# Altium PCB modulo_comunicacion_pcbdoc.PcbDoc
Units mm, origin at the board's own origin, x right, y up, seen from the top; angles counter-clockwise.
Board outline 152.4 x 101.6 mm, 2 copper layers (Top Layer, Bottom Layer); 32 components, 31 nets, 101 pads, 0 vias.
Unrouted connection lines stored in the file: 65.
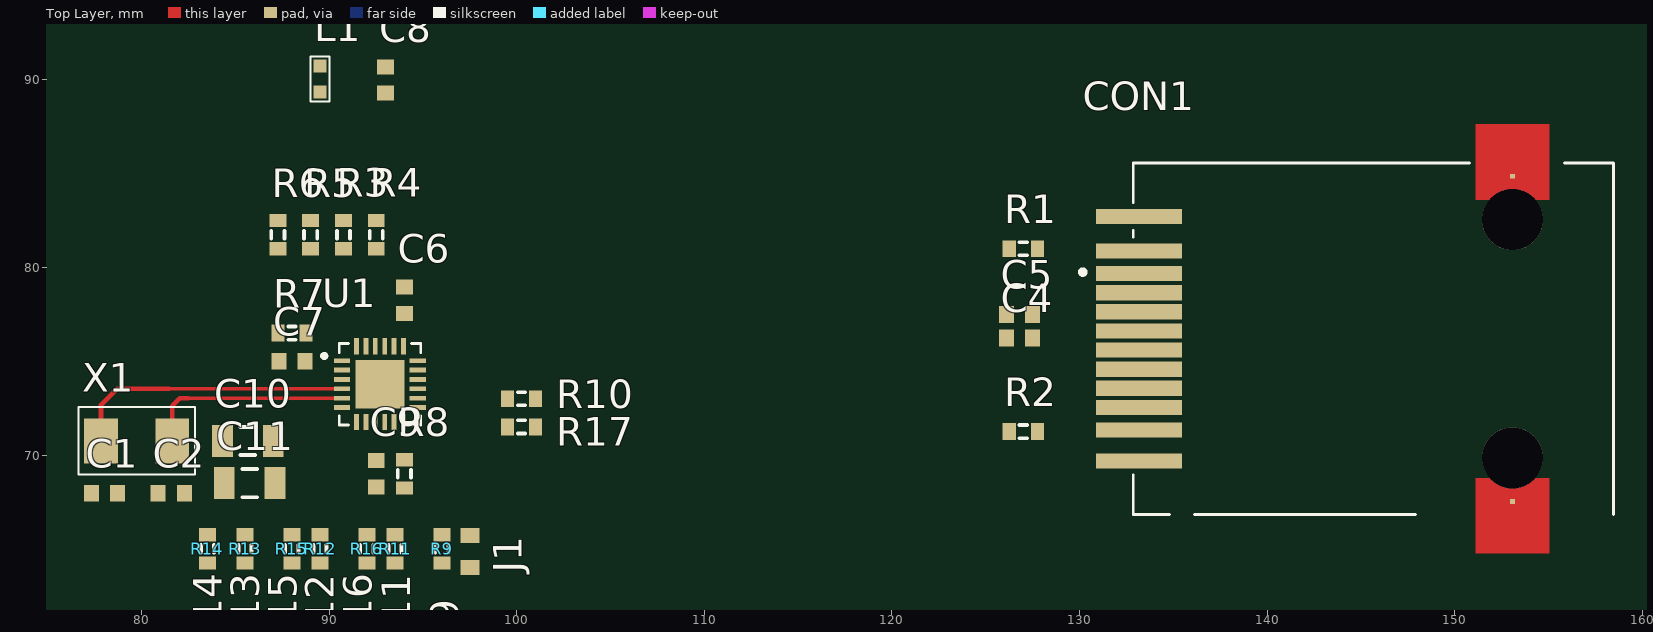
[diagram p0: Top Layer view]
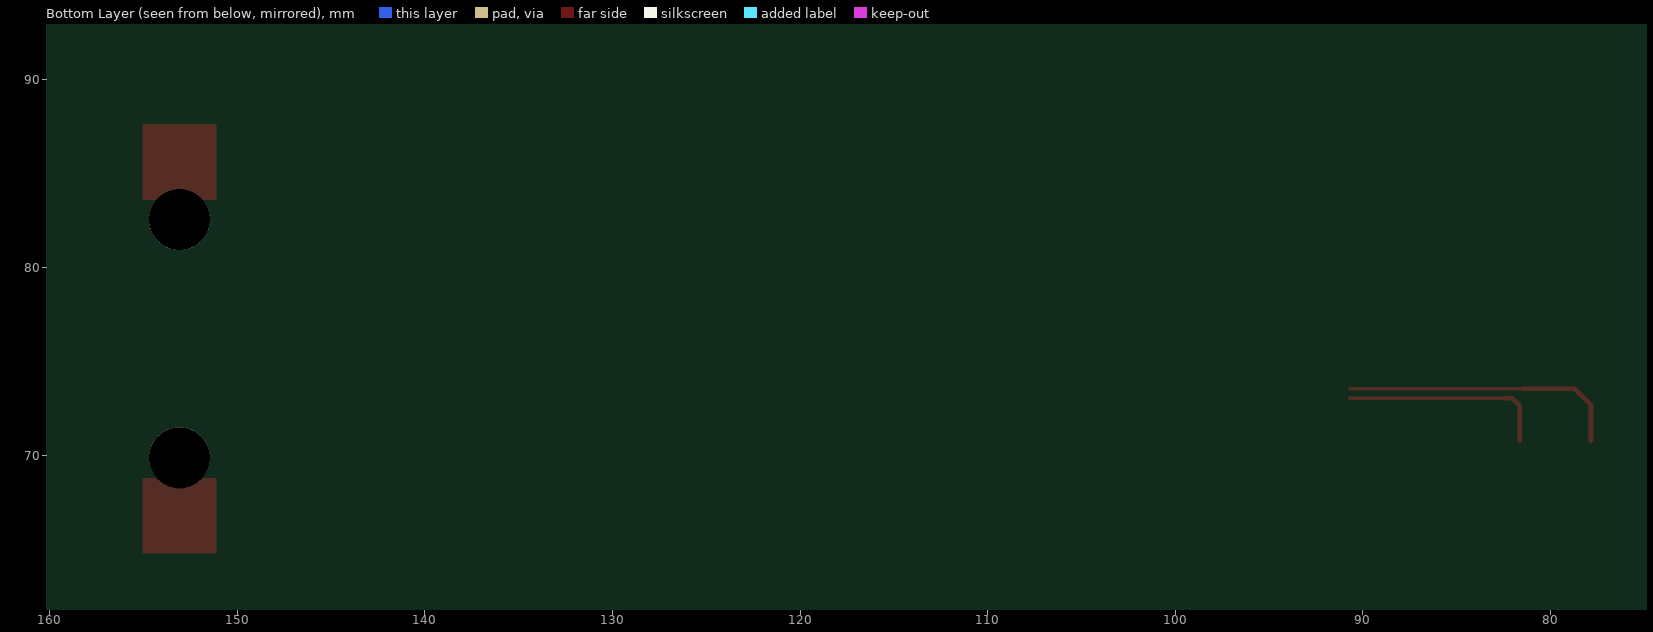
[diagram p1: Bottom Layer view, seen from below]

## Layer stack, top to bottom
Top Solder: solder mask 0.0102, Solder Resist, Dk 3.5
Top Layer: signal copper 0.0356
Dielectric 1: dielectric 0.32, FR-4, Dk 4.8
Bottom Layer: signal copper 0.0356
Bottom Solder: solder mask 0.0102, Solder Resist, Dk 3.5

## Board outline
25.4,25.4 177.8,25.4 177.8,127 25.4,127

## Design rules (kind name [scope] priority, off if disabled: settings)
Clearance Cristal_Net_Class [InNetClass('Cristal_Net_Class')] p1: gap=0.254 ignorepadtopadclearanceinfootprint=FALSE except(0: Arc-Hole Track-Hole SMDPad-Hole THPad-Hole Via-Hole Fill-Hole Poly-Hole Region-Hole Text-Hole; 0.2: Arc-Arc Arc-Track Arc-SMDPad Track-Track Track-SMDPad SMDPad-SMDPad)
Clearance [All] p2: gap=0.254 ignorepadtopadclearanceinfootprint=FALSE except(0: Arc-Hole Track-Hole SMDPad-Hole THPad-Hole Via-Hole Fill-Hole Poly-Hole Region-Hole Text-Hole; 0.2: SMDPad-SMDPad)
PolygonConnect [All] p1: connectstyle=Relief reliefconductorwidth=0.254 reliefentries=4 polygonreliefangle="90 Angle" airgapwidth=0.254
RoutingVias [All] p1: holewidth=0.711 width=1.27 viastyle="Through Hole" minholewidth=0.711 minwidth=1.27 maxholewidth=0.711 maxwidth=1.27
SolderMaskExpansion [All] p1: expansion=0.102 istentingtop=FALSE
Width Cristal_Net_Class_1 [All] p1: maxlimit=0.254 minlimit=0.254 preferedwidth=0.254
Width [All] p2: maxlimit=0.254 minlimit=0.2 preferedwidth=0.254 minimp=50.000000 maximp=50.000000 favimp=50.000000
30 further rules are at their usual default settings.

## Classes and differential pairs
net class Cristal_Net_Class: NetC1_2 NetC2_2
pad class Ethernet_Pad_Class: CON1-1 CON1-2 CON1-3 CON1-4 CON1-5 CON1-6 CON1-7 CON1-8 CON1-9 CON1-10 CON1-11 CON1-12 CON1-13 CON1-14 CON1-16 CON1-17

## Components (designator, comment, footprint, x,y, rotation, side; value= is the part's Value field where it differs from the comment)
C1 "Cap Semi" 1608[0603] 78.013,67.966 r180 top value=30pF
C2 "Cap Semi" 1608[0603] 81.572,67.966 r0 top value=30pF
C4 "Cap Semi" 1608[0603] 126.8,76.25 r0 top value=100nF
C5 "Cap Semi" 1608[0603] 126.8,77.5 r0 top value=100nF
C6 "Cap Semi" 1608[0603] 94,78.25 r270 top value=100nF
C7 "Cap Semi" 1608[0603] 88,75 r0 top value=100nF
C8 "Cap Semi" 1608[0603] 93,90 r270 top value=10uF
C9 "Cap Semi" 1608[0603] 92.5,69 r90 top value=100nF
C10 "Cap Semi" C1206 85.65,70.75 r0 top value=470nF
C11 "Cap Semi" C1206 85.75,68.5 r0 top value=10uF
CON1 "ARJE-0034" ARJE-0034 145.669,76.2 r270 top
J1 "JUMPER_SMD_0603" JUMPER_SMD_0603 97.5,64 r90 top
L1 "GLRF1608T101M-LR" GLRF1608T101M-LR 89.5,90.75 r270 top
R1 "Res3" J1-0603 127,81 r0 top value=270
R2 "Res3" J1-0603 127,71.25 r0 top value=270
R3 "Res3" J1-0603 90.75,81.75 r90 top value=50
R4 "Res3" J1-0603 92.5,81.75 r90 top value=50
R5 "Res3" J1-0603 89,81.75 r90 top value=50
R6 "Res3" J1-0603 87.25,81.75 r90 top value=50
R7 "Res3" J1-0603 88,76.5 r0 top value=12K1
R8 "Res3" J1-0603 94,69 r90 top value=10K
R9 "Res3" J1-0603 96,65 r270 top value=1K5
R10 "Res3" J1-0603 100.25,73 r0 top value=10K
R11 "Res3" J1-0603 93.5,65 r270 top value=10K
R12 "Res3" J1-0603 89.5,65 r270 top value=10K
R13 "Res3" J1-0603 85.5,65 r270 top value=10K
R14 "Res3" J1-0603 83.5,65 r270 top value=33
R15 "Res3" J1-0603 88,65 r90 top value=33
R16 "Res3" J1-0603 92,65 r270 top value=33
R17 "Res3" J1-0603 100.25,71.5 r0 top value=33
U1 "LAN8742A-CZ" LAN8742A-CZ 92.697,73.783 r0 top
X1 "E5FA25" E5FA25 77.824,70.76 r0 top

## Footprints (in the part's own frame and the unit in brackets; to place one, negate y for a bottom-side part, rotate by r counter-clockwise, add the part's x,y. Pads: shape width x height; smd on the part's side, far side on the other; paste and mask are expansions set on the pad)
1608[0603] [mm] "Chip Capacitor, Body 1.6x0.8mm, IPC High Density"
  rect 0.8x0.9 smd: 1(-0.7,0) 2(0.7,0)
  body extent -0.87,-0.48 0.87,0.48, height 1.3
ARJE-0034 [mil]
  rect 32x181 smd paste+0 mask+0: 1(-256.69,-492.18) 2(-184.25,-492.18) 3(-137.01,-492.18) 4(-96.85,-492.18) 5(-56.69,-492.18) 6(-16.54,-492.18) 7(23.62,-492.18) 8(63.78,-492.18) 9(103.94,-492.18) 10(144.09,-492.18) 11(191.34,-492.18) 12(256.69,-492.18)
  rect 10x10 smd: 13(-341.34,292.11) 14(341.34,292.11)
  round 128 hole 128: 16(250,292.11) 17(-250,292.11)
  Top Layer region: 450,215.11 450,369.11 292.34,369.11 292.34,215.11
  Top Layer region: -292.34,215.11 -292.34,369.11 -450,369.11 -450,215.11
  silkscreen extent -369,-615 369,504, body extent -407,-569 407,506, height 660
C1206 [mm] "Chip Capacitor, Body 3.2x1.6mm, IPC High Density"
  rect 1.1x1.7 smd: 1(-1.35,0) 2(1.35,0)
  silkscreen extent -0.4,-0.75 0.4,0.75, body extent -1.7,-0.9 1.7,0.9, height 1.3
E5FA25 [mm]
  rect 1.8x2.4 smd: 1(0,0) 2(3.8,0)
  silkscreen extent -1.2,-1.8 5,1.8, body extent -0.6,-1.6 4.4,1.6, height 1.4
GLRF1608T101M-LR [mm]
  rect 0.7x0.7 smd: 1(0,0) 2(1.4,0)
  silkscreen extent -0.5,-0.5 1.9,0.5, body extent -0.1,-0.4 1.5,0.4, height 0.8
J1-0603 [mm] "Chip Resistor, Body 1.6x0.8mm, IPC High Density"
  rect 0.7x0.9 smd: 1(-0.75,0) 2(0.75,0)
  silkscreen extent -0.2,-0.35 0.2,0.35, body extent -0.85,-0.48 0.85,0.48, height 0.9
JUMPER_SMD_0603 [mm]
  rect 0.8x1 smd: 1(0,0) 2(1.7,0)
  body extent 0.05,-0.4 1.65,0.4, height 0.45
LAN8742A-CZ [mil]
  rect 34x9.84 smd paste+0 mask+0: 1(-79.5,49.21) 2(-79.5,29.53) 3(-79.5,9.84) 4(-79.5,-9.84) 5(-79.5,-29.53) 6(-79.5,-49.21) 13(79.5,-49.21) 14(79.5,-29.53) 15(79.5,-9.84) 16(79.5,9.84) 17(79.5,29.53) 18(79.5,49.21)
  rect 9.84x34 smd paste+0 mask+0: 7(-49.21,-79.5) 8(-29.53,-79.5) 9(-9.84,-79.5) 10(9.84,-79.5) 11(29.53,-79.5) 12(49.21,-79.5) 19(49.21,79.5) 20(29.53,79.5) 21(9.84,79.5) 22(-9.84,79.5) 23(-29.53,79.5) 24(-49.21,79.5)
  rect 102x102 smd paste-50.5 mask+0: 25(0,0)
  silkscreen extent -121,-86 86,86, body extent -81,-81 81,81, height 55

## Part data
C1 C2 C4 C5 C6 C7 C8 C9 C10 C11: "Capacitor (Semiconductor SIM Model)", LatestRevisionDate=29-May-2009, LatestRevisionNote="IPC-7351 Footprint Added.", PackageDescription="Chip Capacitor", PackageReference=C1206, Published=8-Jun-2000, Publisher="Altium Limited"
CON1: library part ARJE-0034_MOD, "CONECTOR RJ45 MAGNETICO", Color=Green,Yellow, Current Rating=8mA, Manufacturer=Abracon, Max Operating Temperature=70°C, Min Operating Temperature=0°C, Package Quantity=1, Category="Modular / Ethernet Connectors", Connector Type=RJ45, Direction=Up, Gender=Male, Lead Free="Lead Free", Manufacturer Part Number=ARJE-0034, Mount="Surface Mount", Number of Contacts=8, Number of Cores per Jack=4, Number of Ports=1, Number of Positions=12, Number of Rows=1, Orientation="Right Angle", Packaging="Tape and Reel", Pitch=1.02mm, Radiation Hardening=No, Shielding=Shielded, Termination=Solder
L1: "FIXED IND 100UH 80MA 5.5 OHM SMD", Case Code (Imperial)=0603, Case Code (Metric)=1608, Current Rating=25mA, DC Current=80mA, DC Resistance (DCR)=5.5R, Inductance=100uH, Manufacturer=TDK, Manufacturer Part Number=GLFR1608T101M-LR, Max Operating Temperature=105°C, Min Operating Temperature=-40°C, Package Quantity=4000, Tolerance=20%, Case/Package=0603, Category="Fixed Inductors", ComponentLink1Description=https://datasheet.ciiva.com/1040/glfrseries-1040797.pdf?src-supplier=Digi-Key, ComponentLink1URL=https://datasheet.ciiva.com/1040/glfrseries-1040797.pdf?src-supplier=Digi-Key, ComponentLink2Description=https://datasheet.ciiva.com/1040/glfrseries-1040798.pdf?src-supplier=Digi-Key, ComponentLink2URL=https://datasheet.ciiva.com/1040/glfrseries-1040798.pdf?src-supplier=Digi-Key, ComponentLink3Description=https://datasheet.ciiva.com/1040/glfrseries-1040799.pdf?src-supplier=Digi-Key, ComponentLink3URL=https://datasheet.ciiva.com/1040/glfrseries-1040799.pdf?src-supplier=Digi-Key, Depth=1mm, Height=0.031inch, Lead Free="Lead Free", Length=0.063inch, Max DC Current=80mA, Military Standard=Not, Mount="Surface Mount", Packaging="Tape and Reel", Pricing 1="1=0,27000, 10=0,24400, 100=0,16760, 500=0,14324, 1000=0,10971 (USD)", RoHS=Yes, Saturation Current=25mA, Shielding=Shielded, Stock 1=31108, Supplier 1=Digi-Key, Termination=SMD/SMT, Width=0.8mm
R1 R2 R3 R4 R5 R6 R7 R8 R9 R10 R11 R12 R13 R14 R15 R16 R17: "Resistor", LatestRevisionDate=29-May-2009, LatestRevisionNote="IPC-7351 Footprint Added.", PackageDescription="Chip Resistor", PackageReference=J1-0603, Published=8-Jun-2000, Publisher="Altium Limited"
U1: library part LAN8742A-CZ_MOD, "IC TRANSCEIVER 1/1 24SQFN", Manufacturer=Microchip, Category="Interface ICs", Manufacturer Part Number=LAN8742A-CZ
X1: "E5FA 25.0000 F15 E33"

## Nets (pads, with @x,y where several pads share a name; then routed paths per layer and width w, separated by ;. In a path a pad name is that pad's centre, name@x,y a point inside that pad or via, vN(x,y) a via of type N, cw(c..) or ccw(c..) an arc to the next point about the centre after c; other vN are vias at no path point)
+3V3_MCP1825: C9.2 L1.1 R9.2 R10.2 R11.2 R12.2 R13.2 U1.9
CT: C4.2 C5.2 C6.2 C7.2 C8.2 CON1.5 CON1.6 L1.2 R3.2 R4.2 R5.2 R6.2 U1.1 U1.19
GND: C1.1 C2.1 C4.1 C5.1 C6.1 C7.1 C8.1 C9.1 C10.1 C11.1 CON1.10 CON1.13 CON1.14 R1.1 R2.1 R7.1 R8.1 U1.25
LED1_YELLOW_A: CON1.1 U1.3
LED1_YELLOW_K: CON1.2 R1.2
LED2_GREEN_A: CON1.12 U1.2
LED2_GREEN_K: CON1.11 R2.2
NetC1_2: C1.2 U1.4 X1.1 | length 15.1
  Top Layer w0.2: 81.453,73.533 U1.4
  Top Layer w0.254: X1.1 77.824,72.676 78.681,73.533 81.453,73.533
NetC2_2: C2.2 U1.5 X1.2 | length 11.1
  Top Layer w0.2: 82.467,73.033 U1.5
  Top Layer w0.254: X1.2 81.624,72.624 82.033,73.033 82.467,73.033
NetC10_2: C10.2 C11.2 U1.6
NetJ1_1: J1.1
NetJ1_2: J1.2 R9.1 U1.12
NetR7_2: R7.2 U1.24
NetR8_2: R8.2 U1.10
NetR10_1: R10.1 R17.1 U1.14
NetR11_1: R11.1 R16.1 U1.11
NetR12_1: R12.1 R15.2 U1.8
NetR13_1: R13.1 R14.1 U1.7
NetR14_2: R14.2
NetR15_1: R15.1
NetR16_2: R16.2
NetR17_2: R17.2
NetU1_13: U1.13
NetU1_15: U1.15
NetU1_16: U1.16
NetU1_17: U1.17
NetU1_18: U1.18
RX_N: CON1.8 R6.1 U1.22
RX_P: CON1.7 R5.1 U1.23
TX_N: CON1.4 R4.1 U1.20
TX_P: CON1.3 R3.1 U1.21
pads on no net: CON1.9 CON1.16 CON1.17